# Altium PCB main.PcbDoc
Units mm, origin at the board's own origin, x right, y up, seen from the top; angles counter-clockwise.
Board outline 45 x 75 mm, 2 copper layers (Top copper, Bottom copper), stack 1.586 mm thick; 11 components, 0 nets, 58 pads, 0 vias.
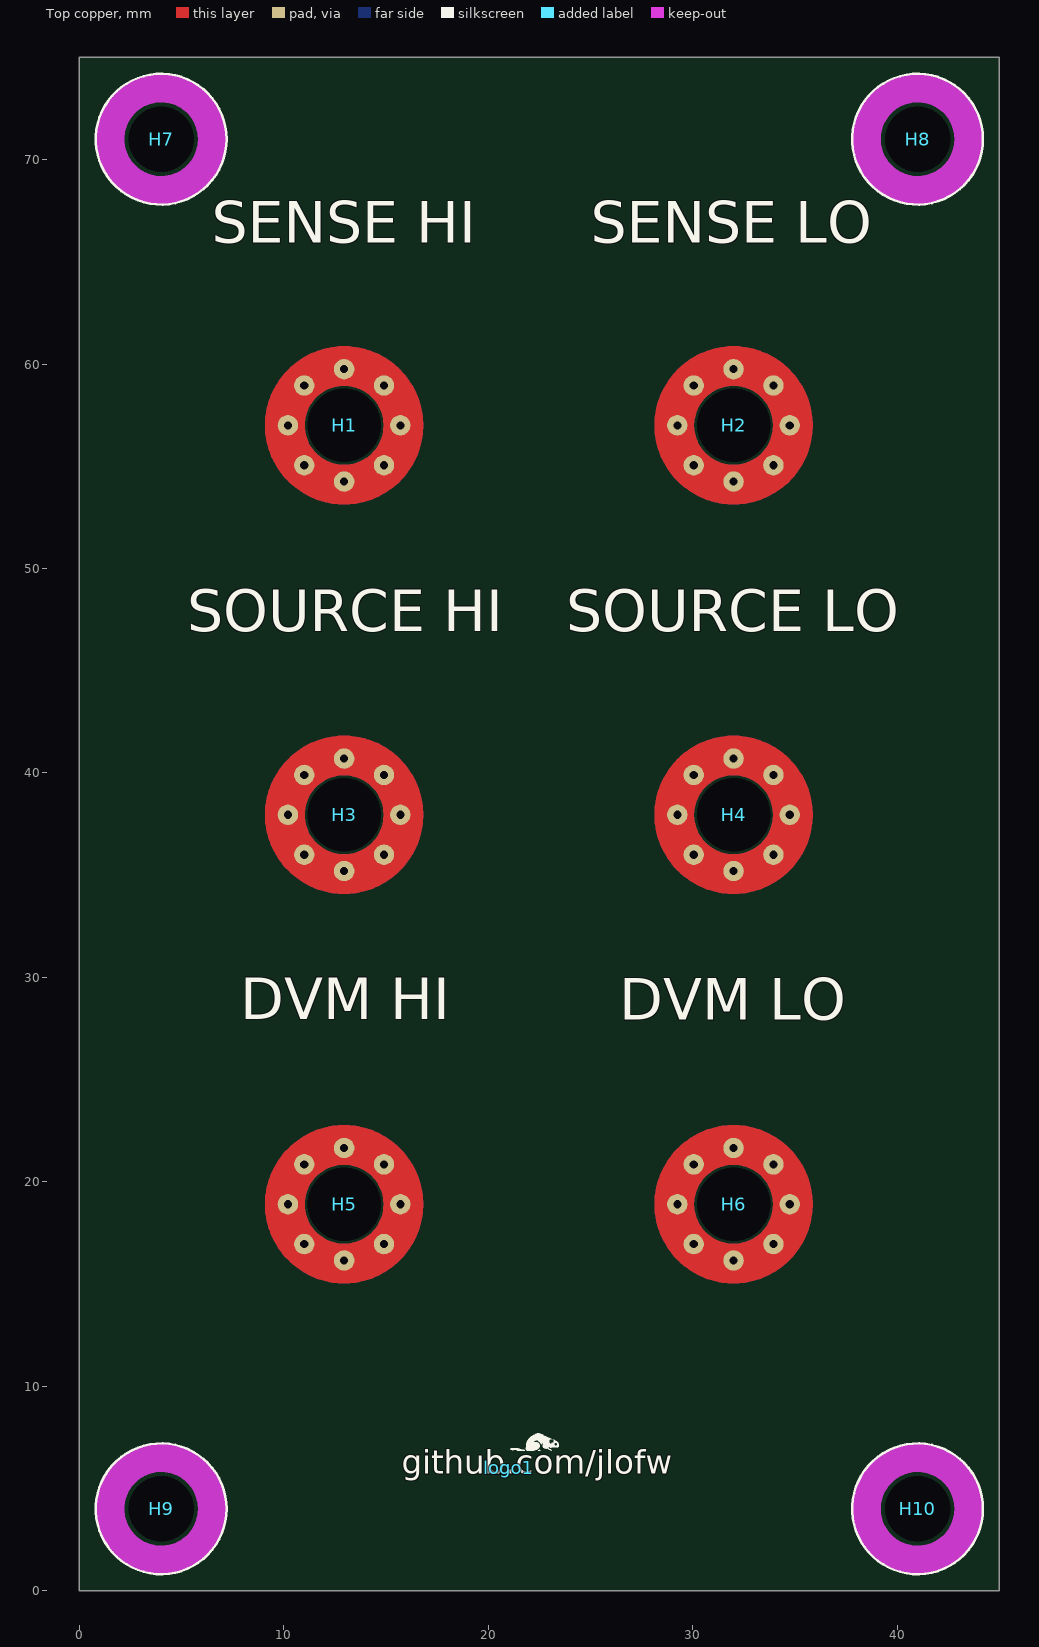
[diagram p0: Top copper view]
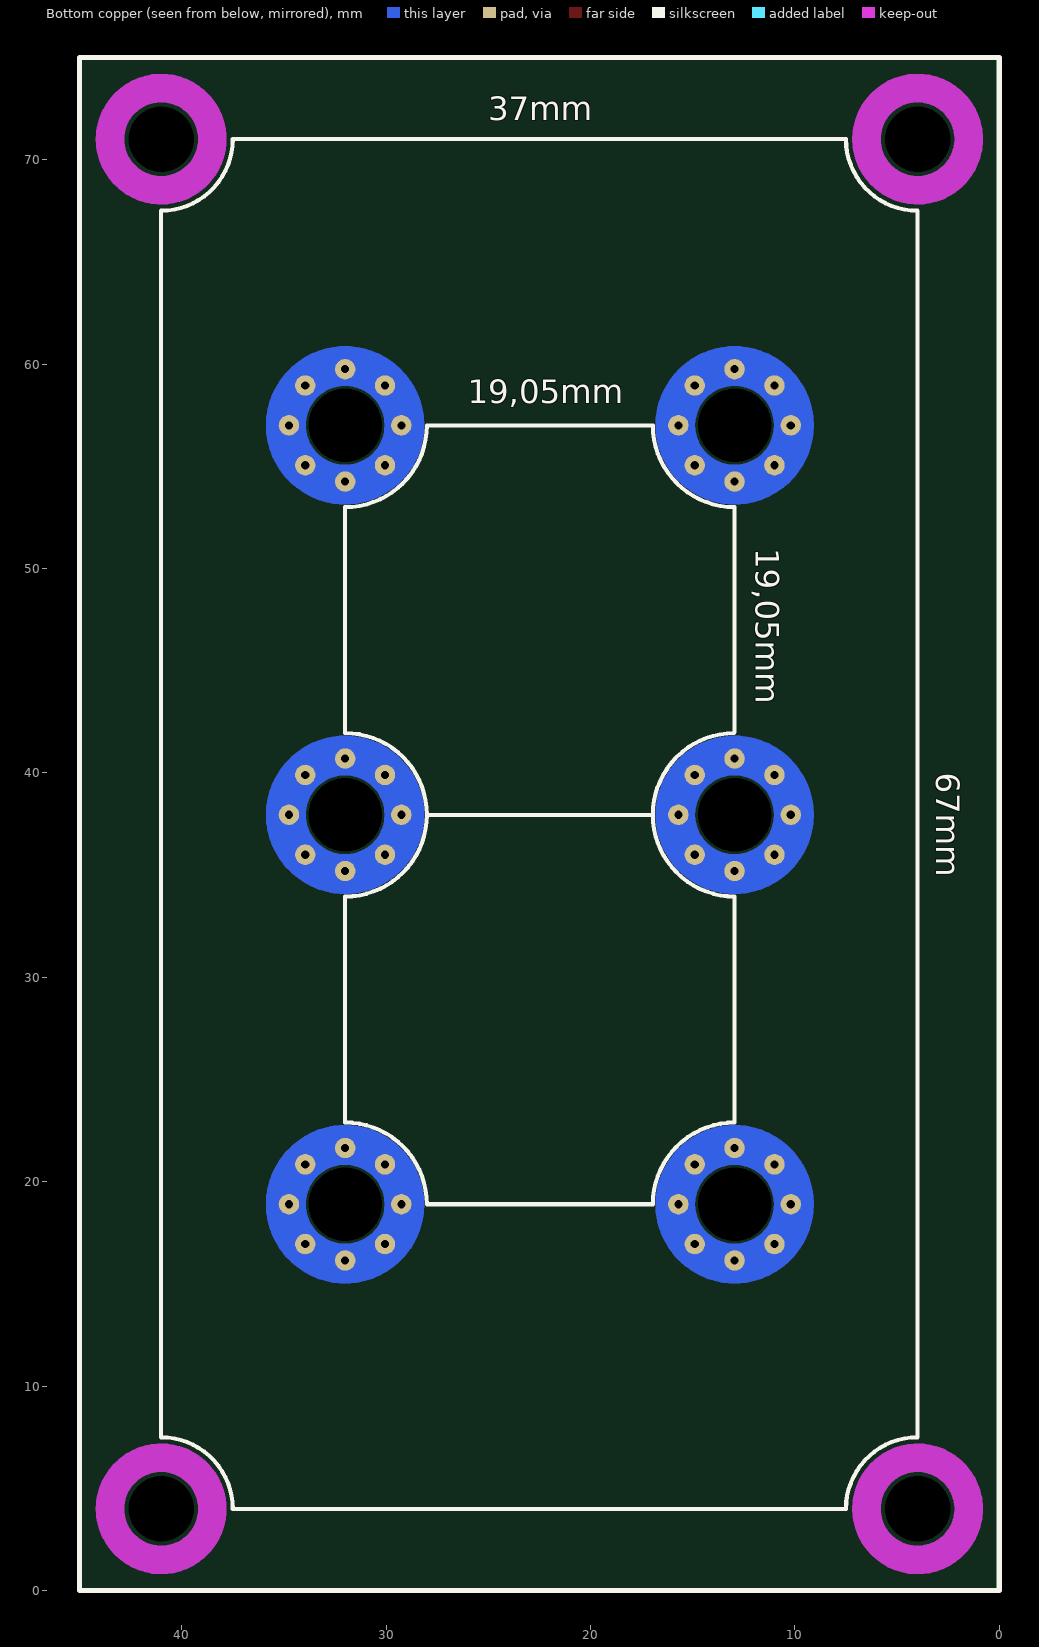
[diagram p1: Bottom copper view, seen from below]

## Layer stack, top to bottom
Top Solder: solder mask 0.025, Solder Resist, Dk 3.6
Top copper: signal copper 0.018
Dielectric 1: dielectric 1.55, FR-4, Dk 4.4
Bottom copper: signal copper 0.018
Bottom Solder: solder mask 0.025, Solder Resist, Dk 3.6

## Board outline
0,0 0,75 45,75 45,0

## Design rules (kind name [scope] priority, off if disabled: settings)
BoardOutlineClearance [All] p1: gap=0.254 ignorepadtopadclearanceinfootprint=FALSE except(0: Arc-SplitContinuation Track-SplitContinuation SMDPad-SplitContinuation THPad-SplitContinuation Via-SplitContinuation Fill-SplitContinuation Poly-SplitContinuation Region-SplitContinuation Text-SplitContinuation)
Clearance [All] p1: gap=0.2 ignorepadtopadclearanceinfootprint=TRUE except(0.1: Arc-Arc)
DiffPairsRouting [All] p1: maxlimit=0.254 minlimit=0.254 mostfreqgap=0.254 toplayer_minwidth=0.2 toplayer_maxwidth=0.381 toplayer_prefwidth=0.381 bottomlayer_minwidth=0.2 bottomlayer_maxwidth=0.381 bottomlayer_prefwidth=0.381 maxuncoupledlength=12.7
Height [All] p1: minheight=0 maxheight=1000 prefheight=12.7
HoleSize [All] p1: absolutevalues=TRUE maxlimit=4 minlimit=0.2 maxpercent=80.000 minpercent=20.000
NetsToIgnore [InNet('GND')] p1:
PolygonConnect PowerPolygonConnect [InNetClass('PowerNet')] p1: connectstyle=Direct reliefconductorwidth=0.254 reliefentries=4 polygonreliefangle="90 Angle" airgapwidth=0.254
PolygonConnect [All] p2: connectstyle=Relief reliefconductorwidth=0.254 reliefentries=4 polygonreliefangle="90 Angle" airgapwidth=0.254
RoutingVias [All] p1: holewidth=0.2 width=0.6 viastyle="Through Hole" minholewidth=0.2 minwidth=0.6 maxholewidth=3 maxwidth=3.6 useviatemplates=TRUE viatemplateguid#1={8A2419F9-FE0F-4950-AD33-AFA5706682D3} viatemplatename#1=v60h20
SolderMaskExpansion [All] p1: expansion=0.102 istentingtop=FALSE
UnRoutedNet [All] p1: checkbadconnections=TRUE
Width [All] p1: maxlimit=1.16 minlimit=0.254 preferedwidth=0.58
26 further rules are at their usual default settings.

## Classes and differential pairs
component class main: H7 H8 H9 H10 logo1

## Components (designator, comment, footprint, x,y, rotation, side; value= is the part's Value field where it differs from the comment)
H1 "Deltron 552 binding post" deltron_552 12.95,57 r0 top
H2 "Deltron 552 binding post" deltron_552 32,57 r0 top
H3 "Deltron 552 binding post" deltron_552 12.95,37.95 r0 top
H4 "Deltron 552 binding post" deltron_552 32,37.95 r0 top
H5 "Deltron 552 binding post" deltron_552 12.95,18.9 r0 top
H6 "Deltron 552 binding post" deltron_552 32,18.9 r0 top
H7 "Unplated M3" MountingHole_3.2mm_M3_NPTH 4,71 r0 top
H8 "Unplated M3" MountingHole_3.2mm_M3_NPTH 41,71 r0 top
H9 "Unplated M3" MountingHole_3.2mm_M3_NPTH 4,4 r0 top
H10 "Unplated M3" MountingHole_3.2mm_M3_NPTH 41,4 r0 top
logo1 "beaver" beaver 21,6 r0 top

## Footprints (in the part's own frame and the unit in brackets; to place one, negate y for a bottom-side part, rotate by r counter-clockwise, add the part's x,y. Pads: shape width x height; smd on the part's side, far side on the other; paste and mask are expansions set on the pad)
beaver [mm]
  silkscreen extent 0.08,0.85 2.46,1.69
deltron_552 [mm] "M3 binding post"
  round 1 hole 0.4: 1(-2.75,0) 1(-1.95,-1.95) 1(-1.95,1.95) 1(0,-2.75) 1(0,2.75) 1(1.95,-1.95) 1(1.95,1.95) 1(2.75,0)
  round 0 hole 3.6 unplated mask+3.6: ""(0,0)
  Multi-Layer circle w1.95: c0,0 r2.9
  body extent -6.93,-6.89 6.93,10.8, height 22.77
MountingHole_3.2mm_M3_NPTH [mm] "Unplated M3 mounting hole without pad"
  round 0 hole 3.2 unplated mask+0: 1(0,0)
  Keep-Out Layer circle w1.4: c0,0 r2.5
  silkscreen extent -3.2,-3.2 3.2,3.2

## Part data
H1 H2 H3 H4 H5 H6: library part 110032, Manufacturer=Deltron, Manufacturer P/N=552, Internal Number=110032
H7 H8 H9 H10: library part 3, Internal Number=3
logo1: library part 4, Internal Number=4

## Nets (pads, with @x,y where several pads share a name; then routed paths per layer and width w, separated by ;. In a path a pad name is that pad's centre, name@x,y a point inside that pad or via, vN(x,y) a via of type N, cw(c..) or ccw(c..) an arc to the next point about the centre after c; other vN are vias at no path point)
pads on no net: H1. H1.1 H2. H2.1 H3. H3.1 H4. H4.1 H5. H5.1 H6. H6.1 H7.1 H8.1 H9.1 H10.1

## Silkscreen, mask and mechanical layers (free items; w line width, h text height)
Top Overlay:
  text "SENSE HI" at 6.471,65.244 h3.5
  text "SENSE LO" at 25.018,65.244 h3.5
  text "SOURCE HI" at 5.276,46.244 h3.5
  text "SOURCE LO" at 23.822,46.244 h3.5
  text "DVM HI" at 7.868,27.273 h3.5
  text "DVM LO" at 26.414,27.244 h3.5
  text "github.com/jlofw" at 15.766,5.325 h2
Bottom Overlay:
  lines w0.2: 12.95,33.9 12.95,22.9 cw(c12.95,18.9) 16.95,18.9 ; 12.95,33.95 ccw(c12.95,37.95) 16.95,37.95 ccw(c12.95,37.95) 12.976,41.95 ; 12.95,42 12.95,53 ccw(c12.95,57) 16.95,57 ; 17,18.9 28,18.9 cw(c32,18.9) 32,22.9 ; 17,37.95 28,37.95 ; 17,57 28,57 ccw(c32,57) 32,53 32,42 ; 32,23 32,33.9 ; 32,33.95 cw(c32,37.95) 28,37.95 ; 32,41.95 ccw(c32,37.95) 28,37.95 ; 4,7.502 cw(c4,4) 7.502,4 37.498,4 cw(c41,4) 41,7.502 41,67.498 cw(c41,71) 37.498,71 7.502,71 cw(c4,71) 4,67.498 ; 4,7.502 4,67.498 ; 4,7.502 4,67.498
  lines w0.254: 0,0 45,0 45,75 0,75 0,0
  text "37mm" at 25,71.525 h2
  text "19,05mm" at 25.999,57.683 h2
  text "19,05mm" at 12.317,50.999 h2 r90
  text "67mm" at 3.475,40 h2 r90
Top Assembly:
  circle w0.1: c32,18.9 r3.536
  circle w0.1: c12.95,18.9 r3.606
  circle w0.1: c32,37.95 r3.606
  circle w0.1: c12.95,37.95 r3.536
  circle w0.1: c12.95,57 r3.536
  circle w0.1: c32,57 r3.536